# Allegro board 2440+TFT57-V1A11.brd
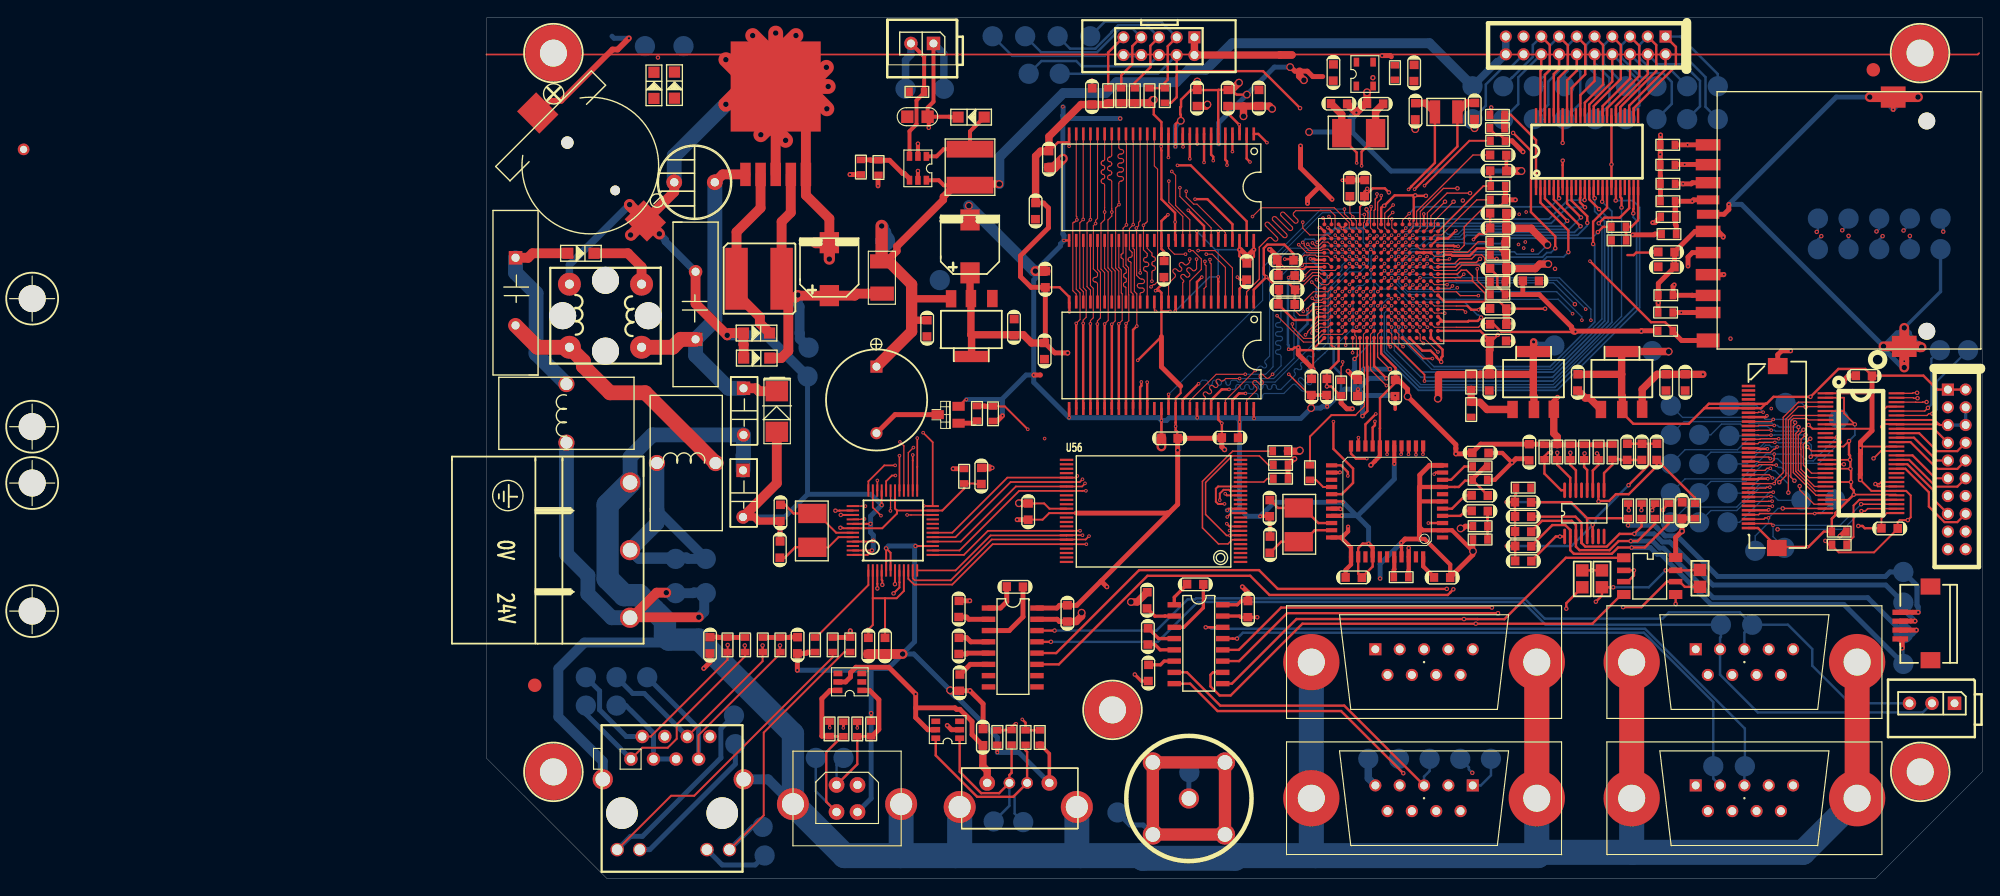
[diagram p0: board, top side]
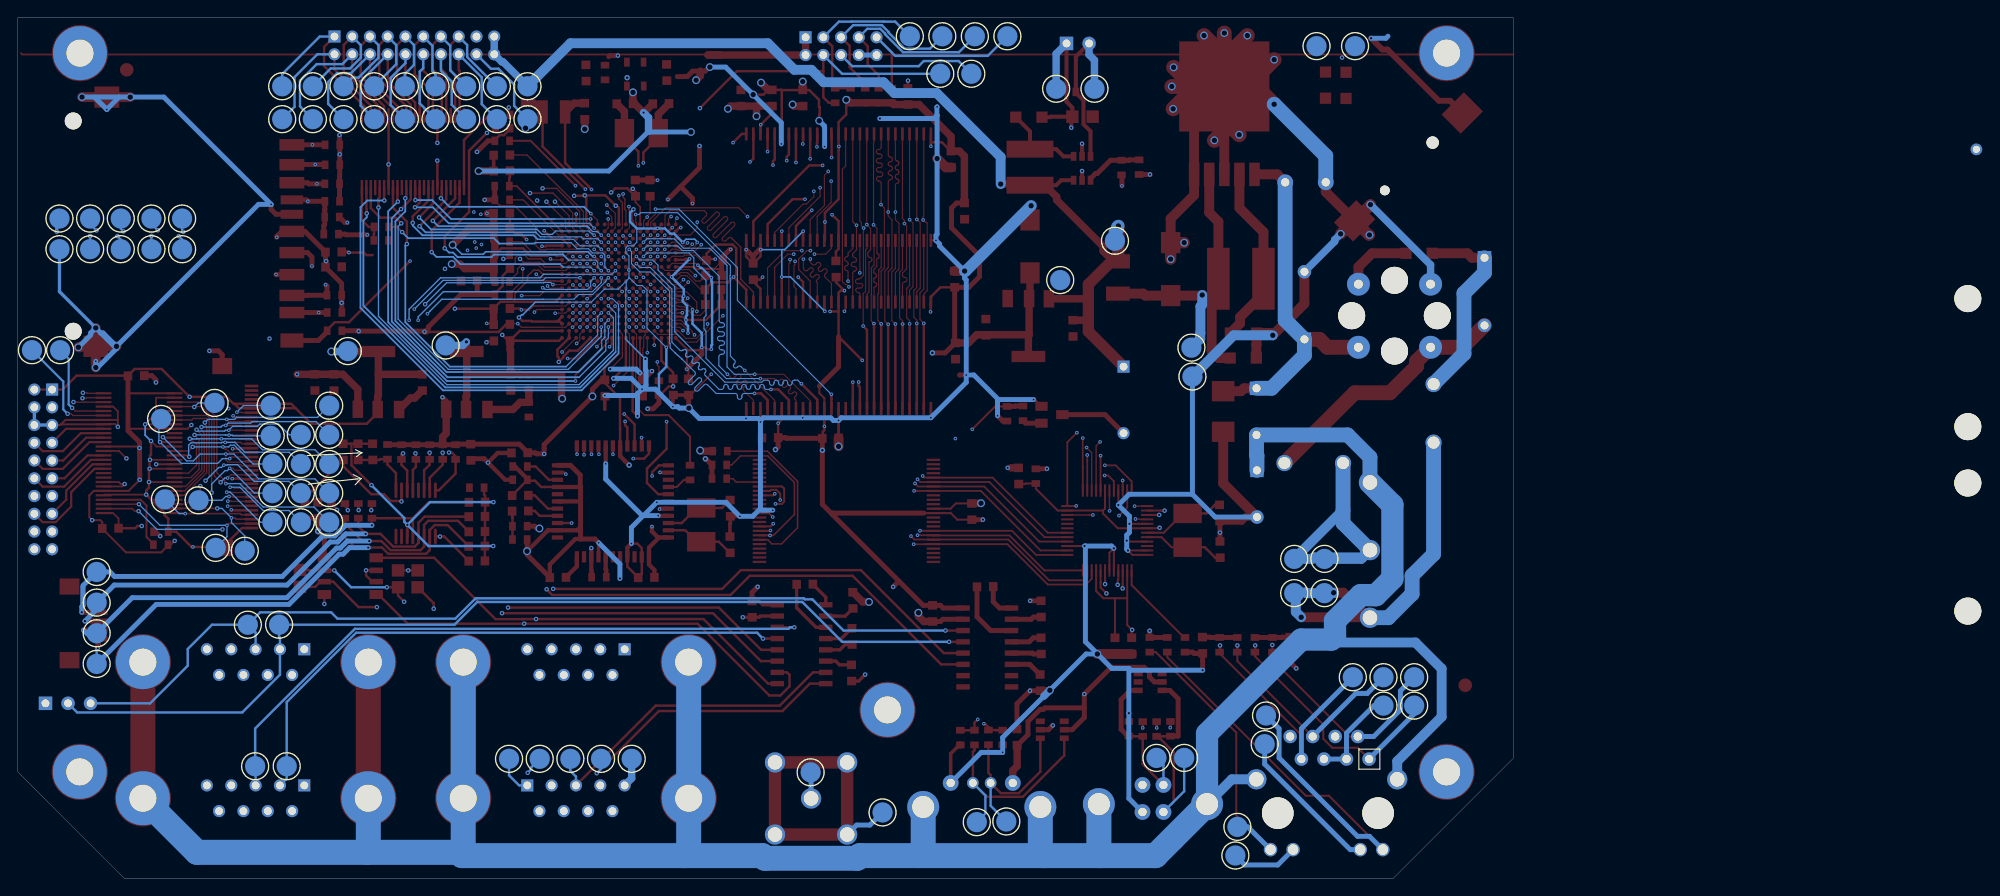
[diagram p1: board, bottom side, seen from below]

Outline 168.5 x 96.98 mm; copper layers: TOP, GND, SIG3, SIG4, VCC, BOTTOM. Coordinates in mm from the lower left corner of the outline.
Outline path: 0,96.98 0,13.51 13.51,0 156.51,0 168.5,11.99 168.5,96.98 0,96.98

## Placement (name value [footprint] x y rotation side)
BT1  BAT/3V/DIP  [BATTCR1220]  11.61 80.39 225 top
BUZZER  -  [BUZZER]  43.92 57.66 270 top
C1  0.1uF  [C0603]  25.15 26.23 270 top
C2  10uf/1206/16V  [C0603]  61.82 75.16 270 top
C3  0.1uF  [C0603]  98.93 77.8 90 top
C4  10uf/1206/16V  [C0603]  117.45 47.98 270 top
C5  10uf/1206/16V  [C0603]  112.95 55.85 270 top
C6  0.047uF  [DIO300C]  3.25 66.12 180 top
C7  0.1uF  [C0603]  114 79.71 0 top
C8  0.047uF  [DIO200C]  28.94 55.22 180 top
C9  0.1uF  [C0603]  35.01 26.23 270 top
C10  100uF  [CAPAE660X570L]  38.61 66.42 90 top
C11  0.1uF  [C0603]  55.93 15.93 90 top
C12  0.1uF  [C0603]  135.03 55.85 270 top
C13  220uf/ECAP-8/35V  [ECAP-8]  23.42 78.44 0 top
C14  1000pf  [C0603]  114 74.93 0 top
C15  10U  [C0603]  42.98 26.16 270 top
C16  100uF  [CAPAE660X570L]  54.46 68.99 90 top
C17  330pf  [C0603]  114 73.25 0 top
C18  680pf  [C0603]  114 81.48 0 top
C19  0.1uF  [C0603]  102.34 55.22 270 top
C20  10uF  [C0603]  62.84 59.39 270 top
C21  0.1uF  [C0603]  134.7 41.48 90 top
C22  10uF  [C0603]  132.89 68.91 180 top
C23  0.1uF  [C0603]  61.04 41.35 90 top
C24  0.1uF  [C0603]  59.44 62.13 90 top
C25  0.1UF  [C0603]  114 64.19 0 top
C26  0.1UF  [C0603]  92.91 55.35 270 top
C27  0.1UF  [C0603]  113.97 60.55 0 top
C28  0.1UF  [C0603]  98.12 55.22 270 top
C29  0.1UF  [C0603]  90.09 67.94 180 top
C30  0.1UF  [C0603]  97.28 77.8 90 top
C31  0.1UF  [C0603]  85.65 68.4 90 top
C32  0.1UF  [C0603]  83.77 49.63 0 top
C33  0.1UF  [C0603]  94.64 55.35 270 top
C34  0.1UF  [C0603]  63.32 81 270 top
C35  0.1UF  [C0603]  80.06 87.96 90 top
C36  0.1UF  [C0603]  114 62.41 0 top
C37  0.1UF  [C0603]  114 68.71 0 top
C38  0.1UF  [C0603]  90.14 66.34 180 top
C39  0.1UF  [C0603]  83.52 87.96 90 top
C40  0.1UF  [C0603]  95.38 90.78 270 top
C41  0.1UF  [C0603]  90.09 64.69 180 top
C42  0.1UF  [C0603]  76.91 49.61 180 top
C43  0.1UF  [C0603]  76.33 68.68 90 top
C44  0.1UF  [C0603]  62.97 67.54 90 top
C45  0.1UF  [C0603]  104.47 90.73 270 top
C46  22PF  [C0603]  96.06 87.27 0 top
C47  22PF  [C0603]  100.08 87.3 180 top
C49  0.1uF  [C0603]  85.75 30.3 270 top
C50  0.1uF  [C0603]  132.89 70.59 180 top
C51  22PF  [C0603]  111.3 86.44 270 top
C52  22PF  [C0603]  104.62 86.41 270 top
C54  0.1uF  [C0603]  97.71 33.88 0 top
C58  0.1uF  [C0603]  89.97 69.67 180 top
C60  0.1uF  [C0603]  68.22 88.14 90 top
C61  0.1uF  [C0603]  65.41 29.82 270 top
C62  0.047uF  [DIO200C]  28.89 45.97 180 top
C63  0.047uF  [DIO300C]  23.54 64.54 0 top
C64  0.1uF  [C0603]  131.85 48.08 90 top
C65  10uf/0603/16V  [C0603]  116.76 35.76 180 top
C66  10uf  [C0603]  128.52 48.08 90 top
C67  0.1uF  [C0603]  130.18 48.08 90 top
C68  1000p  [C0603]  116.76 37.44 180 top
C69  1000p  [C0603]  116.75 39.08 180 top
C70  1000p  [C0603]  116.75 40.78 180 top
C71  1000p  [C0603]  116.74 42.39 180 top
C72  47nF  [C0603]  111.86 41.4 180 top
C73  20P  [C0603]  88.24 41.73 90 top
C74  20P  [C0603]  88.24 37.57 270 top
C75  47nF  [C0603]  111.86 43.15 180 top
C76  47nF  [C0603]  107.62 33.91 180 top
C77  1uf/25V  [C0805]  48.54 85.83 90 top
C78  0.1uF  [C0603]  44.86 26.16 270 top
C79  10PF  [C0603]  33.06 37.07 90 top
C80  10PF  [C0603]  33.08 41.15 270 top
C81  0.1uF  [RC0603]  55.75 45.36 90 top
C82  10uf/1206/16V  [C0603]  87.02 87.96 90 top
C83  100uF/CAP-D  [C0603]  117.68 67.31 0 top
C84  0.1uF  [C0603]  132.87 55.85 270 top
C85  0.1uF  [C0603]  111.99 47.93 0 top
C86  0.1uF  [C0603]  59.49 32.87 180 top
C87  0.1uF  [C0603]  53.21 30.38 90 top
C88  0.1uF  [C0603]  53.31 22.07 90 top
C89  0.1uF  [C0603]  53.21 26.21 90 top
C90  0.1uF  [C0603]  74.4 31.29 270 top
C91  0.1uF  [C0603]  74.57 23.16 90 top
C92  0.1uF  [C0603]  79.81 33.15 180 top
C93  0.1uF  [C0603]  74.52 27.28 90 top
C94  0.1uF  [C0603]  155.14 56.64 180 top
C95  0.1uF  [C0603]  158.04 39.45 180 top
CB1  0.1uF  [C0603]  49.61 61.95 270 top
CB2  10uf  [C0603]  122.91 55.85 270 top
CON1  JTAG  [HEADER5X2_2MM]  75.74 93.78 270 top
D3  sod123  [SOD123]  30.4 61.44 180 top
D4  sod123  [SOD123]  10.62 70.43 180 top
D9  SS14  [SOD123]  54.58 85.78 0 top
D10  1N5819  [B130L]  32.69 52.6 270 top
D11  sod123  [SOD123]  30.43 58.62 180 top
DB1  sod123  [SOD123]  18.85 89.36 270 top
DB2  sod123  [SOD123]  21.16 89.38 270 top
F1  FUSE  [R1210]  44.53 67.74 180 top
H1  -  [HEADER2]  50.34 94.08 180 top
HOSTA  USB-A  [USBAH]  59.89 10.74 270 top
I/OPROT1  FPC_18p_DOWN  [HEADER10X2_2MM]  123.82 93.86 270 top
J2  HEADER 1  [MH250C120D]  7.52 92.99 0 top
J3  HEADER 1  [MH250C120D]  7.52 11.99 0 top
J4  HEADER 1  [MH250C120D]  70.51 18.97 0 top
J5  HEADER 1  [MH250C120D]  161.52 11.99 0 top
J8  HEADER 1  [MH250C120D]  161.49 92.99 0 top
J19  HEADER 1  [MH150]  -51.21 65.32 0 top
J21  HEADER 1  [MH150]  -51.21 50.89 0 top
J22  HEADER 1  [MH150]  -51.21 30.11 0 top
J23  HEADER 1  [MH150]  -51.21 44.54 0 top
J24  SD  [SD-PROA]  159.72 59.94 90 top
L6  100UH  [CD75]  30.69 67.56 270 top
L7  22UH  [CDRH4D18]  54.46 80.14 0 top
L8  F.B/120  [R0603]  53.8 45.31 270 top
L10  F.B/120  [R0603]  111.91 44.91 0 top
L12  F.B/120  [R0603]  116.79 44.02 180 top
L13  F.B/120  [L-260X600]  8.99 52.4 90 top
L14  choke  [CHOKE_UU_11X12]  13.39 63.4 0 top
L15  F.B/120  [L-260X600]  22.49 46.79 0 top
LAN1  HY951180A  [RJ45_HY]  16.26 13.44 270 top
LVDS1  HEADER10x2_2mm  [HEADER10X2_2MM]  165.63 46.08 0 top
NOREF  -  [unnamed]  156.23 91.11 0 top
NOREF#2  -  [unnamed]  5.42 21.75 0 top
Q2  3904  [SOT23]  51.99 52.25 270 top
R1  NC  [R0603]  113.87 84.53 0 top
R2  NC  [R0603]  127.56 71.88 0 top
R3  10k  [R0603]  57.05 52.35 270 top
R4  33R  [R0603]  29.12 26.31 270 top
R5  10k  [R0603]  44.15 80.09 90 top
R6  10k  [R0603]  110.92 55.93 270 top
R7  10k  [R0603]  110.92 52.81 90 top
R8  510  [R0603]  38.98 26.31 270 top
R9  510  [R0603]  40.97 26.31 270 top
R10  NC  [R0603]  113.87 86.03 0 top
R11  NC  [R0603]  127.53 73.41 0 top
R12  100  [R0603]  133.17 41.4 90 top
R13  100  [R0603]  131.65 41.4 90 top
R14  100  [R0603]  130.12 41.4 90 top
R15  100  [R0603]  128.6 41.4 90 top
R16  100R  [R0603]  113.94 78 180 top
R17  100R  [R0603]  102.34 90.8 270 top
R18  10K  [R0603]  113.92 83.11 180 top
R19  10K  [R0603]  89.46 46.58 180 top
R20  10K  [R0603]  89.46 45.03 180 top
R21  10k  [R0603]  42.16 80.14 90 top
R22  10K  [R0603]  113.92 71.73 0 top
R23  10K  [R0603]  113.92 65.79 0 top
R24  10K  [R0603]  113.92 67.23 0 top
R25  1.5K  [R0603]  38.63 16.84 270 top
R26  510K  [R0603]  43.32 16.84 270 top
R27  33R  [R0603]  27.13 26.31 270 top
R28  33R  [R0603]  33.1 26.31 270 top
R29  10K  [R0603]  113.92 70.26 0 top
R30  0  [R0603]  89.38 48.13 180 top
R31  10K  [R0603]  133.08 76.3 0 top
R32  10K  [R0603]  132.81 61.7 0 top
R33  10K  [R0603]  133.06 80.41 0 top
R34  10K  [R0603]  132.81 63.76 0 top
R35  10K  [R0603]  132.84 65.7 0 top
R36  10K  [R0603]  133.08 78.27 0 top
R37  33R  [R0603]  31.11 26.31 270 top
R38  10K  [R0603]  133.06 82.66 0 top
R39  10K  [R0603]  133.1 74.52 0 top
R40  10K  [R0603]  133.2 72.59 0 top
R41  10K  [R0603]  70.03 88.21 270 top
R42  10K  [R0603]  71.5 88.21 270 top
R43  10K  [R0603]  73.02 88.21 270 top
R44  10K  [R0603]  74.68 88.21 270 top
R45  1K  [R0603]  76.4 88.21 270 top
R46  0  [R0603]  113.92 76.45 0 top
R47  4.7K  [R0603]  96.27 55.25 90 top
R48  10k  [R0603]  55.25 52.4 270 top
R49  F.B/120  [R0603]  136.14 41.4 90 top
R50  10K  [R0603]  120.62 48.03 90 top
R51  10K  [R0603]  119.18 48.03 90 top
R52  10K  [R0603]  122.1 48.03 90 top
R53  10K  [R0603]  123.65 48.03 90 top
R54  10K  [R0603]  125.27 48.03 90 top
R55  F.B/120  [R0603]  126.85 48.06 270 top
R56  5R1  [R0603]  48.46 88.62 0 top
R57  18  [R0603]  111.94 39.67 180 top
R58  56  [R0603]  111.94 38.18 180 top
R59  1.5K  [R0603]  103.02 33.93 0 top
R60  10  [R0603]  92.76 45.72 270 top
R61  5.1K  [R0603]  111.91 46.41 0 top
R62  6.8K,1%  [R0603]  36.99 26.31 270 top
R63  10k  [R0603]  152.37 39.07 0 top
R64  10k  [R0603]  152.4 37.59 180 top
R65  120R  [R0805]  136.7 34.75 0 top
R66  0R  [R0805]  125.65 32.79 180 top
R67  0R  [R0805]  123.44 32.79 180 top
RDM  22R  [R0603]  41.76 16.81 90 top
RDP  22R  [R0603]  40.2 16.81 90 top
RS485  DB9  [DB9-DIP]  105.61 9.02 0 top
RU1  15K  [R0603]  62.31 15.85 90 top
RU2  15K  [R0603]  57.54 15.85 90 top
RUN  22R  [R0603]  59.14 15.88 90 top
RUP  22R  [R0603]  60.71 15.85 90 top
SLAVE  USB-B  [USB_B_VERTICAL]  39.42 7.47 0 top
SN75LVDS83B1  SN75LVDS83B  [TSSOP56]  154.84 47.9 0 top
T1  TP  [TEST55]  51.05 67.41 180 bottom
T2  TP  [TEST55]  120.29 60.05 180 bottom
T3  TP  [TEST55]  22.17 93.78 180 bottom
T4  TP  [TEST55]  24.69 32.13 180 bottom
T5  TP  [TEST55]  21.29 32.13 180 bottom
T6  TP  [TEST55]  21.29 35.99 180 bottom
T7  TP  [TEST55]  24.69 35.99 180 bottom
T8  TP  [TEST55]  36.27 59.8 180 bottom
T9  TP  [TEST55]  36.15 56.54 180 bottom
T10  TP  [TEST55]  11.18 19.46 180 bottom
T11  TP  [TEST55]  11.18 22.66 180 bottom
T12  TP  [TEST55]  14.63 19.46 180 bottom
T13  TP  [TEST55]  14.63 22.66 180 bottom
T14  TP  [TEST55]  18.08 22.66 180 bottom
T15  TP  [TEST55]  27.86 18.34 180 bottom
T16  TP  [TEST55]  28.02 15.11 180 bottom
T17  TP  [TEST55]  31.32 2.57 180 bottom
T18  TP  [TEST55]  31.09 5.79 180 bottom
T19  TP  [TEST55]  79.17 11.94 180 bottom
T20  TP  [TEST55]  71.07 7.42 180 bottom
T21  TP  [TEST55]  146.2 37.24 180 bottom
T22  TP  [TEST55]  142.93 36.91 180 bottom
T23  TP  [TEST55]  151.92 42.7 180 bottom
T24  TP  [TEST55]  166.9 59.51 180 bottom
T25  TP  [TEST55]  163.73 59.51 180 bottom
T26  TP  [TEST55]  148.13 42.6 180 bottom
T27  TP  [TEST55]  139.81 40.12 180 bottom
T28  TP  [TEST55]  136.61 40.12 180 bottom
T29  TP  [TEST55]  133.41 40.12 180 bottom
T30  TP  [TEST55]  146.33 53.57 180 bottom
T31  TP  [TEST55]  139.81 43.4 180 bottom
T32  TP  [TEST55]  136.61 43.4 180 bottom
T33  TP  [TEST55]  133.41 43.4 180 bottom
T34  TP  [TEST55]  152.35 51.77 180 bottom
T35  TP  [TEST55]  139.81 46.69 180 bottom
T36  TP  [TEST55]  136.61 46.69 180 bottom
T37  TP  [TEST55]  133.41 46.69 180 bottom
T38  TP  [TEST55]  140 49.86 180 bottom
T39  TP  [TEST55]  136.61 49.98 180 bottom
T40  TP  [TEST55]  133.41 49.98 180 bottom
T41  TP  [TEST55]  133.41 53.26 180 bottom
T42  TP  [TEST55]  140 53.26 180 bottom
T44  TP  [TEST55]  51.51 88.98 180 bottom
T45  TP  [TEST55]  47.19 88.98 180 bottom
T46  TP  [TEST55]  159.61 24.16 180 bottom
T47  TP  [TEST55]  159.61 27.61 180 bottom
T48  TP  [TEST55]  159.61 31.06 180 bottom
T49  TP  [TEST55]  159.61 34.52 180 bottom
T50  TP  [TEST55]  139.06 28.57 180 bottom
T51  TP  [TEST55]  142.58 28.57 180 bottom
T52  TP  [TEST55]  138.2 12.62 180 bottom
T53  TP  [TEST55]  141.76 12.62 180 bottom
T54  TP  [TEST55]  102.79 13.46 180 bottom
T55  TP  [TEST55]  106.24 13.46 180 bottom
T56  TP  [TEST55]  99.33 13.46 180 bottom
T57  TP  [TEST55]  44.88 71.84 180 bottom
T58  TP  [TEST55]  114.53 85.55 180 bottom
T59  TP  [TEST55]  111.07 85.55 180 bottom
T60  TP  [TEST55]  114.53 89.26 180 bottom
T61  TP  [TEST55]  117.98 89.26 180 bottom
T62  TP  [TEST55]  117.98 85.55 180 bottom
T63  TP  [TEST55]  121.44 85.55 180 bottom
T64  TP  [TEST55]  121.44 89.26 180 bottom
T65  TP  [TEST55]  124.89 89.26 180 bottom
T66  TP  [TEST55]  124.89 85.55 180 bottom
T67  TP  [TEST55]  128.35 85.55 180 bottom
T68  TP  [TEST55]  131.8 85.55 180 bottom
T69  TP  [TEST55]  128.35 89.26 180 bottom
T70  TP  [TEST55]  131.8 89.26 180 bottom
T71  TP  [TEST55]  135.26 85.55 180 bottom
T72  TP  [TEST55]  138.71 85.55 180 bottom
T73  TP  [TEST55]  135.26 89.26 180 bottom
T74  TP  [TEST55]  138.71 89.26 180 bottom
T75  TP  [TEST55]  40.21 13.56 180 bottom
T76  TP  [TEST55]  111.07 89.26 180 bottom
T77  TP  [TEST55]  37.08 13.56 180 bottom
T78  TP  [TEST55]  57.12 6.4 180 bottom
T80  TP  [TEST55]  60.45 6.32 180 bottom
T81  TP  [TEST55]  131.32 59.41 180 bottom
T82  TP  [TEST55]  17.83 93.78 180 bottom
T83  TP  [TEST55]  68 94.89 180 bottom
T84  TP  [TEST55]  64.33 94.89 180 bottom
T85  TP  [TEST55]  60.67 94.89 180 bottom
T86  TP  [TEST55]  57.01 94.89 180 bottom
T87  TP  [TEST55]  64.56 90.67 180 bottom
T88  TP  [TEST55]  61.07 90.67 180 bottom
T89  TP  [TEST55]  163.8 74.35 180 bottom
T90  TP  [TEST55]  163.8 70.89 180 bottom
T91  TP  [TEST55]  160.35 74.35 180 bottom
T92  TP  [TEST55]  160.35 70.89 180 bottom
T93  TP  [TEST55]  156.9 74.35 180 bottom
T94  TP  [TEST55]  156.9 70.89 180 bottom
T95  TP  [TEST55]  153.44 74.35 180 bottom
T96  TP  [TEST55]  153.44 70.89 180 bottom
T97  TP  [TEST55]  149.99 74.35 180 bottom
T98  TP  [TEST55]  149.99 70.89 180 bottom
T99  TP  [TEST55]  109.69 13.46 180 bottom
T100  TP  [TEST55]  113.15 13.46 180 bottom
T*  -  [unnamed#2]  -52.17 82.14 0 top
TP2  HEADCONN_5P  [FH12-4-1SH]  160.07 28.47 270 top
TV_IN1  TV_IN  [BNC_L]  79.12 8.99 0 top
U1  74LCX16245/SSOP48-S  [TSSOP48]  123.98 81.89 90 top
U8  LM2576-5v/TO252  [TO263]  29.16 79.32 0 top
U18  DM9000AE  [LQPFP48]  45.76 39.19 0 top
U19  MAX3232C/SOP16  [SOP16]  56.54 30.45 270 top
U36  MAX485/SOP8  [SOP8]  128.37 35.97 270 top
U37  MAX3232C/SOP16  [SOP16]  77.47 30.82 270 top
U38  LM1117-33/SOT-223  [SOT-223]  54.64 65.28 180 top
U39  LM1117-33/SOT-223  [SOT-223]  127.88 52.88 0 top
U42  TCS5180/SOT23-6  [SOT23-6]  48.59 80.01 180 top
U45  SAA7113H/PQFP44  [PQFP44]  101.45 42.47 180 top
U49  ADS7843/TSSOP16  [SSOP16]  123.67 41.12 90 top
U51  S3C2410X_45  [FBGA289]  100.78 67.29 90 top
U52  MAX811  [SOT23-4]  98.93 90.63 0 top
U53  LM1117-33/SOT-223  [SOT-223]  117.92 52.88 0 top
U54  K4S561632C-TC75 (32MB)  [TSOP54-II]  76.02 77.88 180 top
U55  K4S561632C-TC75 (32MB)  [TSOP54-II]  76.02 58.94 180 top
U56  K9GAG08U0M/TSOP48  [TSOP48]  75.13 41.4 90 top
UART0  -  [HEADER3]  161.57 19.72 180 top
UART1  DB9  [DB9-DIP-1]  141.71 9.02 0 top
UART2  DB9  [DB9-DIP-1]  105.61 24.36 0 top
UART3  DB9  [DB9-DIP-1]  141.71 24.36 0 top
UNK12V  HEADER 1  [HEADER300-3]  16.15 36.98 270 top
UNK57TFT  K4S561632C-TC75 (32MB)  [FH12-33S-05SF01]  142.16 45.72 270 top
UU1  NUP2201MR6/SOT23-6  [SOT23-6]  40.92 22.12 90 top
UU2  NUP2201MR6/SOT23-6  [SOT23-6]  51.94 16.74 90 top
Y4  32.768KHz  [32768-2PINSMD]  106.83 86.36 180 top
Y6  25MHz  [CRYSTAL5X3]  36.7 37.3 90 top
Y11  24.576MHz  [CRYSTAL5X3]  91.49 41.73 270 top
Y12  12MHz  [CRYSTAL5X3]  96.34 83.97 0 top

## Library data of the parts
BT1 = BATTERY_3
BUZZER = MICROPHONE
C1 C9 C78 = CAP NP
C2 C4 C5 C15 = 03CAP+_0
C3 C11 C12 C49 C50 C54 C58 C60 C61 C84 CB1 CB2 = CAP_0.1uF_0603
C6 C8 C25-C47 C51 C52 C62 C63 C81-C83 = CAP NP_1
C7 C14 C17-C24 C72-C76 = CAP NP_4
C10 C13 C16 C66 = CAPACITOR POL_0
C64 C67-C71 C79 C80 = CAPACITOR NON-POL_0
C65 = CAPACITOR POL_1
C77 C85-C93 = C_0
C94 C95 = CAP_4.1uF_0603
CON1 = CY7C68013A-100_11
D3 D9 = DIODE
D4 D10 D11 DB1 DB2 = DIODE SCHOTTKY_1
F1 = FUSE_0
H1 = CON2_1
HOSTA SLAVE = CON2_3
I/OPROT1 = SH_TFT_0
J2-J5 J8 J19 J21-J23 = HEADER 1
J24 = SD_7
L6 L7 L10 = INDUCTOR_0
L8 L12 = INDUCTOR_2
L13 L15 = INDUCTOR_1
L14 = INDUCTOR_3
LAN1 = CON12_6
LVDS1 = 20Pin_0
Q2 = NPN_0
R1-R3 R5-R7 R10 R11 R21 R48 = R_0
R4 R18 R25-R28 R37 R56-R61 = RESISTOR_2
R8 R9 R16 R17 R31-R36 R38-R40 R62 = R
R12-R15 R63 R64 = RESISTOR_0
R19 R20 R22-R24 R29 R30 R41-R47 R65-R67 RDM RDP RU1 RU2 RUN RUP = R_1
R49-R55 = R_2
RS485 = CONNECTOR DB9_3
SN75LVDS83B1 = K4S561632C_0
T1-T42 T44-T78 T80-T100 = TEST_9
TP2 = HEADER 5_2
TV_IN1 = CY7C68013A-100_13
U1 = 74ALVC164245_0
U8 = CY7C68013A-100_5
U18 = DM9000AE_1
U19 = max232_0
U36 = MNE20-5G5P10_1
U37 U52 = max232_2
U38 U39 U53 = CY7C68013A-100_1
U42 = HEADER 5_1
U45 = GL811USB _1: Tolerance: ***; User Part Number: ***
U49 = ADS7843_3
U51 = S3C2410X_45
U54 U55 = K4S561632C_1
U56 = K9WAG08_0
UART0 = HEADER 11_3
UART1-UART3 = CONNECTOR DB9_2
UNK12V = HEADER 1_2
UNK57TFT = K4S561632C_3
UU1 UU2 = XC9216_3
Y4 = CRYSTAL_4
Y6 = HC-49_0
Y11 Y12 = CRYSTAL_3

## Footprints (pads in the part's own frame, mm; a bottom-side part is the same pattern mirrored in y, then rotated)
32768-2PINSMD
  rect 1.194x2.642 smd: 1(-2.54,0) 2(0,0)
B130L
  rect 2.286x2.54 smd: 1(2.286,0) 2(-2.286,0)
BATTCR1220
  round 1.397 hole 1.397 unplated: (0,-3.556)
  rect 3.048x3.556 smd: 1(0,-8.28) 2(0.025,8.89)
  round 1.092 hole 1.092: 3(0,4.064)
BNC_L
  round 2.286 hole 1.651: 1(0,0) 2(4.064,4.064) 3(4.064,-4.064) 4(-4.064,4.064) 5(-4.064,-4.064)
BUZZER
  rect 1.372x1.372 hole 0.889: 1(0,0)
  round 1.372 hole 0.889: 2(7.5,0)
C0603
  rect 0.965x1.016 smd: 1(-0.94,0.025) 2(0.889,0)
C0805
  rect 1.422x1.397 smd: 1(0,1.143) 2(0,-1.143)
CAPAE660X570L
  rect 2.388x2.184 smd: 1(-0.762,0) 2(5.207,0)
CD75
  rect 6.985x2.54 smd: 1(0,2.54) 2(0,-2.54)
CDRH4D18
  rect 5.283x1.905 smd: 1(0,2.032) 2(0,-2.032)
CHOKE_UU_11X12
  round 3.048 hole 3.048 unplated: (-4.826,0) (0,3.988) (0,-3.988) (4.826,0)
  round 2.591 hole 1.016: 1(-4.064,-3.556) 2(4.064,-3.556) 3(4.064,3.556) 4(-4.064,3.556)
CRYSTAL5X3
  rect 2.184x3.2 smd: 1(0,0) 2(3.81,0)
DB9-DIP
  rect 1.372x1.372 hole 0.889: 1(5.486,1.448)
  round 1.372 hole 0.889: 2(2.743,1.448) 3(0,1.448) 4(-2.743,1.448) 5(-5.486,1.448) 6(4.115,-1.448) 7(1.372,-1.448) 8(-1.372,-1.448) 9(-4.115,-1.448)
  round 6.35 hole 3.048: 10(-12.7,0) 11(12.7,0)
DB9-DIP-1
  rect 1.372x1.372 hole 0.889: 1(-5.486,1.448)
  round 1.372 hole 0.889: 2(-2.743,1.448) 3(0,1.448) 4(2.743,1.448) 5(5.486,1.448) 6(-4.115,-1.448) 7(-1.372,-1.448) 8(1.372,-1.448) 9(4.115,-1.448)
  round 6.35 hole 3.048: 10(-12.7,0) 11(12.7,0)
DIO200C
  rect 1.524x1.524 hole 0.914: 1(0,0)
  round 1.524 hole 0.914: 2(0,5.258)
DIO300C
  rect 1.524x1.524 hole 0.914: 1(0,-3.81)
  round 1.524 hole 0.914: 2(0,3.81)
ECAP-8
  round 1.778 hole 0.94: 1(2.286,0) 2(-2.286,0)
FBGA289
  round 0.457 smd: A1(-6.4,6.4) A2(-5.6,6.4) A3(-4.8,6.4) A4(-4,6.4) A5(-3.2,6.4) A6(-2.4,6.4) A7(-1.6,6.4) A8(-0.8,6.4) A9(0,6.4) A10(0.8,6.4) A11(1.6,6.4) A12(2.4,6.4) A13(3.2,6.4) A14(4,6.4) A15(4.8,6.4) A16(5.6,6.4) A17(6.4,6.4) B1(-6.4,5.6) B2(-5.6,5.6) B3(-4.8,5.6) B4(-4,5.6) B5(-3.2,5.6) B6(-2.4,5.6) B7(-1.6,5.6) B8(-0.8,5.6) B9(0,5.6) B10(0.8,5.6) B11(1.6,5.6) B12(2.4,5.6) B13(3.2,5.6) B14(4,5.6) B15(4.8,5.6) B16(5.6,5.6) B17(6.4,5.6) C1(-6.4,4.8) C2(-5.6,4.8) C3(-4.8,4.8) C4(-4,4.8) C5(-3.2,4.8) C6(-2.4,4.8) C7(-1.6,4.8) C8(-0.8,4.8) C9(0,4.8) C10(0.8,4.8) C11(1.6,4.8) C12(2.4,4.8) C13(3.2,4.8) C14(4,4.8) C15(4.8,4.8) C16(5.6,4.8) C17(6.4,4.8) D1(-6.4,4) D2(-5.6,4) D3(-4.8,4) D4(-4,4) D5(-3.2,4) D6(-2.4,4) D7(-1.6,4) D8(-0.8,4) D9(0,4) D10(0.8,4) D11(1.6,4) D12(2.4,4) D13(3.2,4) D14(4,4) D15(4.8,4) D16(5.6,4) D17(6.4,4) E1(-6.4,3.2) E2(-5.6,3.2) E3(-4.8,3.2) E4(-4,3.2) E5(-3.2,3.2) E6(-2.4,3.2) E7(-1.6,3.2) E8(-0.8,3.2) E9(0,3.2) E10(0.8,3.2) E11(1.6,3.2) E12(2.4,3.2) E13(3.2,3.2) E14(4,3.2) E15(4.8,3.2) E16(5.6,3.2) E17(6.4,3.2) F1(-6.4,2.4) F2(-5.6,2.4) F3(-4.8,2.4) F4(-4,2.4) F5(-3.2,2.4) F6(-2.4,2.4) F7(-1.6,2.4) F8(-0.8,2.4) F9(0,2.4) F10(0.8,2.4) F11(1.6,2.4) F12(2.4,2.4) F13(3.2,2.4) F14(4,2.4) F15(4.8,2.4) F16(5.6,2.4) F17(6.4,2.4) G1(-6.4,1.6) G2(-5.6,1.6) G3(-4.8,1.6) G4(-4,1.6) G5(-3.2,1.6) G6(-2.4,1.6) G7(-1.6,1.6) G8(-0.8,1.6) G9(0,1.6) G10(0.8,1.6) G11(1.6,1.6) G12(2.4,1.6) G13(3.2,1.6) G14(4,1.6) G15(4.8,1.6) G16(5.6,1.6) G17(6.4,1.6) H1(-6.4,0.8) H2(-5.6,0.8) H3(-4.8,0.8) H4(-4,0.8) H5(-3.2,0.8) H6(-2.4,0.8) H7(-1.6,0.8) H8(-0.8,0.8) H9(0,0.8) H10(0.8,0.8) H11(1.6,0.8) H12(2.4,0.8) H13(3.2,0.8) H14(4,0.8) H15(4.8,0.8) H16(5.6,0.8) H17(6.4,0.8) J1(-6.4,0) J2(-5.6,0) J3(-4.8,0) J4(-4,0) J5(-3.2,0) J6(-2.4,0) J7(-1.6,0) J8(-0.8,0) J9(0,0) J10(0.8,0) J11(1.6,0) J12(2.4,0) J13(3.2,0) J14(4,0) J15(4.8,0) J16(5.6,0) J17(6.4,0) K1(-6.4,-0.8) K2(-5.6,-0.8) K3(-4.8,-0.8) K4(-4,-0.8) K5(-3.2,-0.8) K6(-2.4,-0.8) K7(-1.6,-0.8) K8(-0.8,-0.8) K9(0,-0.8) K10(0.8,-0.8) K11(1.6,-0.8) K12(2.4,-0.8) K13(3.2,-0.8) K14(4,-0.8) K15(4.8,-0.8) K16(5.6,-0.8) K17(6.4,-0.8) L1(-6.4,-1.6) L2(-5.6,-1.6) L3(-4.8,-1.6) L4(-4,-1.6) L5(-3.2,-1.6) L6(-2.4,-1.6) L7(-1.6,-1.6) L8(-0.8,-1.6) L9(0,-1.6) L10(0.8,-1.6) L11(1.6,-1.6) L12(2.4,-1.6) L13(3.2,-1.6) L14(4,-1.6) L15(4.8,-1.6) L16(5.6,-1.6) L17(6.4,-1.6) M1(-6.4,-2.4) M2(-5.6,-2.4) M3(-4.8,-2.4) M4(-4,-2.4) M5(-3.2,-2.4) M6(-2.4,-2.4) M7(-1.6,-2.4) M8(-0.8,-2.4) M9(0,-2.4) M10(0.8,-2.4) M11(1.6,-2.4) M12(2.4,-2.4) M13(3.2,-2.4) M14(4,-2.4) M15(4.8,-2.4) M16(5.6,-2.4) M17(6.4,-2.4) N1(-6.4,-3.2) N2(-5.6,-3.2) N3(-4.8,-3.2) N4(-4,-3.2) N5(-3.2,-3.2) N6(-2.4,-3.2) N7(-1.6,-3.2) N8(-0.8,-3.2) N9(0,-3.2) N10(0.8,-3.2) N11(1.6,-3.2) N12(2.4,-3.2) N13(3.2,-3.2) N14(4,-3.2) N15(4.8,-3.2) N16(5.6,-3.2) N17(6.4,-3.2) P1(-6.4,-4) P2(-5.6,-4) P3(-4.8,-4) P4(-4,-4) P5(-3.2,-4) P6(-2.4,-4) P7(-1.6,-4) P8(-0.8,-4) P9(0,-4) P10(0.8,-4) P11(1.6,-4) P12(2.4,-4) P13(3.2,-4) P14(4,-4) P15(4.8,-4) P16(5.6,-4) P17(6.4,-4) R1(-6.4,-4.8) R2(-5.6,-4.8) R3(-4.8,-4.8) R4(-4,-4.8) R5(-3.2,-4.8) R6(-2.4,-4.8) R7(-1.6,-4.8) R8(-0.8,-4.8) R9(0,-4.8) R10(0.8,-4.8) R11(1.6,-4.8) R12(2.4,-4.8) R13(3.2,-4.8) R14(4,-4.8) R15(4.8,-4.8) R16(5.6,-4.8) R17(6.4,-4.8) T1(-6.4,-5.6) T2(-5.6,-5.6) T3(-4.8,-5.6) T4(-4,-5.6) T5(-3.2,-5.6) T6(-2.4,-5.6) T7(-1.6,-5.6) T8(-0.8,-5.6) T9(0,-5.6) T10(0.8,-5.6) T11(1.6,-5.6) T12(2.4,-5.6) T13(3.2,-5.6) T14(4,-5.6) T15(4.8,-5.6) T16(5.6,-5.6) T17(6.4,-5.6) U1(-6.4,-6.4) U2(-5.6,-6.4) U3(-4.8,-6.4) U4(-4,-6.4) U5(-3.2,-6.4) U6(-2.4,-6.4) U7(-1.6,-6.4) U8(-0.8,-6.4) U9(0,-6.4) U10(0.8,-6.4) U11(1.6,-6.4) U12(2.4,-6.4) U13(3.2,-6.4) U14(4,-6.4) U15(4.8,-6.4) U16(5.6,-6.4) U17(6.4,-6.4)
FH12-4-1SH
  rect 0.61x1.778 smd: 1(-1.5,-0.8) 2(-0.5,-0.8) 3(0.5,-0.8) 4(1.5,-0.8)
  rect 1.829x2.235 smd: 5(-4.4,2.6) 6(3.9,2.6)
FH12-33S-05SF01
  rect 0.305x1.524 smd: 1(-9.75,0) 2(-9.25,0) 3(-8.75,0) 4(-8.25,0) 5(-7.75,0) 6(-7.25,0) 7(-6.75,0) 8(-6.25,0) 9(-5.75,0) 10(-5.25,0) 11(-4.75,0) 12(-4.25,0) 13(-3.75,0) 14(-3.25,0) 15(-2.75,0) 16(-2.25,0) 17(-1.75,0) 18(-1.25,0) 19(-0.75,0) 20(-0.25,0) 21(0.25,0) 22(0.75,0) 23(1.25,0) 24(1.75,0) 25(2.25,0) 26(2.75,0) 27(3.25,0) 28(3.75,0) 29(4.25,0) 30(4.75,0) 31(5.25,0) 32(5.75,0) 33(6.25,0)
  rect 1.829x2.235 smd: 34(-12,3.3) 35(8.5,3.2)
HEADER2
  rect 1.524x1.524 hole 0.889: 1(0,0)
  round 1.524 hole 0.889: 2(2.54,0)
HEADER3
  rect 1.524x1.524 hole 0.889: 1(-3.81,0)
  round 1.524 hole 0.889: 2(-1.27,0) 3(1.27,0)
HEADER5X2_2MM
  rect 1.372x1.372 hole 0.889: 1(-1,4)
  round 1.372 hole 0.889: 2(1,4) 3(-1,2) 4(1,2) 5(-1,0) 6(1,0) 7(-1,-2) 8(1,-2) 9(-1,-4) 10(1,-4)
HEADER10X2_2MM
  rect 1.372x1.372 hole 0.889: 1(-1.001,8.999)
  round 1.372 hole 0.889: 2(1.001,8.999) 3(-1.001,7) 4(1.001,7) 5(-1.001,5.001) 6(1.001,5.001) 7(-1.001,3) 8(1.001,3) 9(-1.001,1.001) 10(1.001,1.001) 11(-1.001,-1.001) 12(1.001,-1.001) 13(-1.001,-3) 14(1.001,-3) 15(-1.001,-5.001) 16(1.001,-5.001) 17(-1.001,-7) 18(1.001,-7) 19(-1.001,-8.999) 20(1.001,-8.999)
HEADER300-3
  round 2.286 hole 1.651: 1(-7.62,0) 2(0,0) 3(7.62,0)
L-260X600
  round 1.829 hole 1.372: 1(-3.302,0) 2(3.302,0)
LQPFP48
  rect 0.229x1.397 smd: 1(-2.75,-4.5) 2(-2.25,-4.5) 3(-1.75,-4.5) 4(-1.25,-4.5) 5(-0.75,-4.5) 6(-0.25,-4.5) 7(0.25,-4.5) 8(0.75,-4.5) 9(1.25,-4.5) 10(1.75,-4.5) 11(2.25,-4.5) 12(2.75,-4.5) 25(2.75,4.5) 26(2.25,4.5) 27(1.75,4.5) 28(1.25,4.5) 29(0.75,4.5) 30(0.25,4.5) 31(-0.25,4.5) 32(-0.75,4.5) 33(-1.25,4.5) 34(-1.75,4.5) 35(-2.25,4.5) 36(-2.75,4.5)
  rect 1.397x0.229 smd: 13(4.5,-2.75) 14(4.5,-2.25) 15(4.5,-1.75) 16(4.5,-1.25) 17(4.5,-0.75) 18(4.5,-0.25) 19(4.5,0.25) 20(4.5,0.75) 21(4.5,1.25) 22(4.5,1.75) 23(4.5,2.25) 24(4.5,2.75) 37(-4.5,2.75) 38(-4.5,2.25) 39(-4.5,1.75) 40(-4.5,1.25) 41(-4.5,0.75) 42(-4.5,0.25) 43(-4.5,-0.25) 44(-4.5,-0.75) 45(-4.5,-1.25) 46(-4.5,-1.75) 47(-4.5,-2.25) 48(-4.5,-2.75)
MH150
  round 3.048 hole 3.048 unplated: (0,0)
MH250C120D
  round 6.35 hole 3.048: 1(0,0)
PQFP44
  rect 1.27x0.483 smd: 1(-6.248,4.064) 2(-6.248,3.251) 3(-6.248,2.438) 4(-6.248,1.626) 5(-6.248,0.813) 6(-6.248,0) 7(-6.248,-0.813) 8(-6.248,-1.626) 9(-6.248,-2.438) 10(-6.248,-3.251) 11(-6.248,-4.064) 23(6.248,-4.064) 24(6.248,-3.251) 25(6.248,-2.438) 26(6.248,-1.626) 27(6.248,-0.813) 28(6.248,0) 29(6.248,0.813) 30(6.248,1.626) 31(6.248,2.438) 32(6.248,3.251) 33(6.248,4.064)
  rect 0.483x1.27 smd: 12(-4.064,-6.248) 13(-3.251,-6.248) 14(-2.438,-6.248) 15(-1.626,-6.248) 16(-0.813,-6.248) 17(0,-6.248) 18(0.813,-6.248) 19(1.626,-6.248) 20(2.438,-6.248) 21(3.251,-6.248) 22(4.064,-6.248) 34(4.064,6.248) 35(3.251,6.248) 36(2.438,6.248) 37(1.626,6.248) 38(0.813,6.248) 39(0,6.248) 40(-0.813,6.248) 41(-1.626,6.248) 42(-2.438,6.248) 43(-3.251,6.248) 44(-4.064,6.248)
R0603
  rect 0.762x0.965 smd: 1(-0.826,0) 2(0.826,0)
R0805
  rect 1.422x1.397 smd: 1(0,0) 2(0,-1.905)
R1210
  rect 2.667x1.6 smd: 1(-0.025,1.854) 2(0,-1.778)
RC0603
  rect 0.965x1.016 smd: 1(-0.94,0.025) 2(0.889,0)
RJ45_HY
  round 3.556 hole 3.556 unplated: (6.096,10.287) (6.096,-1.016)
  round 1.524 hole 0.94: 1(0,0) 2(-2.54,1.27) 3(0,2.54) 4(-2.54,3.81) 5(0,5.08) 6(-2.54,6.35) 7(0,7.62) 8(-2.54,8.89)
  round 1.524 hole 1.194: 9(10.211,-1.549) 10(10.211,0.991) 11(10.211,8.56) 12(10.211,11.1)
  round 2.286 hole 1.651: 13(2.286,-3.175) 14(2.286,12.7)
SD-PROA
  round 1.905 hole 1.905 unplated: (1.702,-2.54) (25.4,-2.54)
  rect 1.295x2.794 smd: 1(20.472,22.098) 2(18.44,22.098) 4(12.954,22.098) 5(10.566,22.098) 6(8.077,22.098) 7(5.74,22.098) 8(3.81,22.098) 9(22.708,22.098)
  rect 1.016x2.54 smd: 3(14.884,22.098) 15(16.51,22.098)
  rect 2.4x2.8 smd: 10(0,0) 12(28.092,1.245)
  rect 1.6x2.591 smd: 11(0.66,22.098)
SOD123
  rect 1.27x1.27 smd: 1(1.473,0) 2(-1.473,0)
SOP8
  rect 1.016x1.524 smd: 1(-0.152,-0.254) 4(3.988,-0.254) 5(3.988,5.588) 8(-0.178,5.588)
  rect 0.635x1.524 smd: 2(1.27,-0.254) 3(2.54,-0.254) 6(2.54,5.588) 7(1.27,5.588)
SOP16
  rect 0.61x1.524 smd: 1(0,0) 2(1.27,0) 3(2.54,0) 4(3.81,0) 5(5.08,0) 6(6.35,0) 7(7.62,0) 8(8.89,0) 9(8.89,5.461) 10(7.62,5.461) 11(6.35,5.461) 12(5.08,5.461) 13(3.81,5.461) 14(2.54,5.461) 15(1.27,5.461) 16(0,5.461)
SOT23
  rect 1.016x1.397 smd: 1(0.965,1.168) 2(-0.94,1.168) 3(0,-1.181)
SOT23-4
  rect 0.635x1.016 smd: 1(-0.953,-1.346) 2(0.94,-1.346) 3(0.94,1.346) 4(-0.94,1.346)
SOT23-6
  rect 0.635x1.016 smd: 1(-0.953,-1.346) 2(0,-1.346) 3(0.953,-1.346) 4(0.953,1.346) 5(0,1.359) 6(-0.953,1.346)
SOT-223
  rect 1.194x1.956 smd: 1(-2.337,-0.051) 2(0.076,-0.051) 3(2.311,-0.025)
  rect 3.81x1.27 smd: 4(0,6.477)
SSOP16
  oval 1.778x0.33 smd: 1(-2.603,2.223) 2(-2.603,1.587) 3(-2.603,0.953) 4(-2.603,0.318) 5(-2.603,-0.318) 6(-2.603,-0.953) 7(-2.603,-1.587) 8(-2.603,-2.223) 9(2.603,-2.223) 10(2.603,-1.587) 11(2.603,-0.953) 12(2.603,-0.318) 13(2.603,0.318) 14(2.603,0.953) 15(2.603,1.587) 16(2.603,2.223)
TEST55
  round 2.286 smd: 1(0,0)
TO263
  rect 1.194x2.642 smd: 1(0,0) 2(1.702,0) 3(3.404,0) 4(5.105,0) 5(6.807,0)
  rect 10.16x10.16 smd: 6(3.404,9.906)
TSOP48
  rect 0.254x1.524 smd: 1(-5.751,-9.799) 2(-5.25,-9.799) 3(-4.75,-9.799) 4(-4.249,-9.799) 5(-3.749,-9.799) 6(-3.251,-9.799) 7(-2.751,-9.799) 8(-2.25,-9.799) 9(-1.75,-9.799) 10(-1.25,-9.799) 11(-0.749,-9.799) 12(-0.249,-9.799) 13(0.249,-9.799) 14(0.749,-9.799) 15(1.25,-9.799) 16(1.75,-9.799) 17(2.25,-9.799) 18(2.751,-9.799) 19(3.251,-9.799) 20(3.749,-9.799) 21(4.249,-9.799) 22(4.75,-9.799) 23(5.25,-9.799) 24(5.751,-9.799) 25(5.751,9.799) 26(5.25,9.799) 27(4.75,9.799) 28(4.249,9.799) 29(3.749,9.799) 30(3.251,9.799) 31(2.751,9.799) 32(2.25,9.799) 33(1.75,9.799) 34(1.25,9.799) 35(0.749,9.799) 36(0.249,9.799) 37(-0.249,9.799) 38(-0.749,9.799) 39(-1.25,9.799) 40(-1.75,9.799) 41(-2.25,9.799) 42(-2.751,9.799) 43(-3.251,9.799) 44(-3.749,9.799) 45(-4.249,9.799) 46(-4.75,9.799) 47(-5.25,9.799) 48(-5.751,9.799)
TSOP54-II
  rect 0.305x1.473 smd: 1(-10.4,-6) 2(-9.6,-6) 3(-8.8,-6) 4(-8,-6) 5(-7.2,-6) 6(-6.4,-6) 7(-5.6,-6) 8(-4.8,-6) 9(-4,-6) 10(-3.2,-6) 11(-2.4,-6) 12(-1.6,-6) 13(-0.8,-6) 14(0,-6) 15(0.8,-6) 16(1.6,-6) 17(2.4,-6) 18(3.2,-6) 19(4,-6) 20(4.8,-6) 21(5.6,-6) 22(6.4,-6) 23(7.2,-6) 24(8,-6) 25(8.8,-6) 26(9.6,-6) 27(10.4,-6) 28(10.4,6) 29(9.6,6) 30(8.8,6) 31(8,6) 32(7.2,6) 33(6.4,6) 34(5.6,6) 35(4.8,6) 36(4,6) 37(3.2,6) 38(2.4,6) 39(1.6,6) 40(0.8,6) 41(0,6) 42(-0.8,6) 43(-1.6,6) 44(-2.4,6) 45(-3.2,6) 46(-4,6) 47(-4.8,6) 48(-5.6,6) 49(-6.4,6) 50(-7.2,6) 51(-8,6) 52(-8.8,6) 53(-9.6,6) 54(-10.4,6)
TSSOP48
  rect 1.702x0.279 smd: 1(-4.05,5.75) 2(-4.05,5.25) 3(-4.05,4.75) 4(-4.05,4.25) 5(-4.05,3.75) 6(-4.05,3.25) 7(-4.05,2.75) 8(-4.05,2.25) 9(-4.05,1.75) 10(-4.05,1.25) 11(-4.05,0.75) 12(-4.05,0.25) 13(-4.05,-0.25) 14(-4.05,-0.75) 15(-4.05,-1.25) 16(-4.05,-1.75) 17(-4.05,-2.25) 18(-4.05,-2.75) 19(-4.05,-3.25) 20(-4.05,-3.75) 21(-4.05,-4.25) 22(-4.05,-4.75) 23(-4.05,-5.25) 24(-4.05,-5.75) 25(4.05,-5.75) 26(4.05,-5.25) 27(4.05,-4.75) 28(4.05,-4.25) 29(4.05,-3.75) 30(4.05,-3.25) 31(4.05,-2.75) 32(4.05,-2.25) 33(4.05,-1.75) 34(4.05,-1.25) 35(4.05,-0.75) 36(4.05,-0.25) 37(4.05,0.25) 38(4.05,0.75) 39(4.05,1.25) 40(4.05,1.75) 41(4.05,2.25) 42(4.05,2.75) 43(4.05,3.25) 44(4.05,3.75) 45(4.05,4.25) 46(4.05,4.75) 47(4.05,5.25) 48(4.05,5.75)
TSSOP56
  rect 1.778x0.254 smd: 1(-4,6.749) 2(-4,6.251) 3(-4,5.751) 4(-4,5.25) 5(-4,4.75) 6(-4,4.249) 7(-4,3.749) 8(-4,3.251) 9(-4,2.751) 10(-4,2.25) 11(-4,1.75) 12(-4,1.25) 13(-4,0.749) 14(-4,0.249) 15(-4,-0.249) 16(-4,-0.749) 17(-4,-1.25) 18(-4,-1.75) 19(-4,-2.25) 20(-4,-2.751) 21(-4,-3.251) 22(-4,-3.749) 23(-4,-4.249) 24(-4,-4.75) 25(-4,-5.25) 26(-4,-5.751) 27(-4,-6.251) 28(-4,-6.749) 29(4,-6.749) 30(4,-6.251) 31(4,-5.751) 32(4,-5.25) 33(4,-4.75) 34(4,-4.249) 35(4,-3.749) 36(4,-3.251) 37(4,-2.751) 38(4,-2.25) 39(4,-1.75) 40(4,-1.25) 41(4,-0.749) 42(4,-0.249) 43(4,0.249) 44(4,0.749) 45(4,1.25) 46(4,1.75) 47(4,2.25) 48(4,2.751) 49(4,3.251) 50(4,3.749) 51(4,4.249) 52(4,4.75) 53(4,5.25) 54(4,5.751) 55(4,6.251) 56(4,6.749)
unnamed
  round 1.524 smd: 1(0,0)
unnamed#2
  round 1.321 hole 0.813: 1(0,0)
USB_B_VERTICAL
  round 1.778 hole 0.94: 1(2.362,3.048) 2(0,3.048) 3(0,0) 4(2.362,0)
  round 3.607 hole 2.489: 5(7.277,0.889) 6(-4.915,0.889)
USBAH
  round 1.778 hole 0.94: 1(0,-3.5) 4(0,3.5)
  round 1.321 hole 0.889: 2(0,-1) 3(0,1)
  round 3.607 hole 2.489: 5(2.71,6.6) 6(2.71,-6.6)

## Nets
5V: BUZZER.1 C11.1 C12.1 C84.1 CB1.1 F1.2 HOSTA.1 I/OPROT1.19(NC1) I/OPROT1.20(NC2) L7.2 T57.1 T76.1 U38.3(IN) U39.3(IN) U42.6(IN) UU1.5(VP) UU2.5(VP)
24V: C8.1 C13.1 C63.1 D10.2 L14.2 U8.1(VIN)
AGND: C64.2 C65.2 C66.2 C67.2 C68.2 C69.2 C70.2 C71.2 L12.2 U49.6(GND)
GND: BT1.2(-) C1.2 C2.2 C3.2 C4.2 C5.2 C7.2 C9.2 C10.2 C11.2 C12.2 C13.2 C14.2 C15.2 C16.2 C17.2 C18.2 C19.2 C20.2 C21.2 C22.2 C23.2 C24.2 C25.2 C26.2 C27.2 C28.2 C29.2 C30.2 C31.2 C32.2 C33.2 C34.2 C35.2 C36.2 C37.2 C38.2 C39.2 C40.2 C41.2 C42.2 C43.2 C44.2 C45.2 C46.2 C47.2 C49.2 C50.2 C51.2 C52.2 C54.2 C58.2 C60.2 C61.2 C62.2 C63.2 C73.1 C74.1 C77.1 C78.2 C79.2 C80.2 C81.2 C82.2 C83.2 C84.2 C85.2 C87.2 C88.1 C90.1 C91.1 C94.2 C95.2 CB1.2 CB2.2 CON1.8(GND) CON1.10(DGND) D3.1 D10.1 D11.1 HOSTA.4 I/OPROT1.17(D1) I/OPROT1.18(D0) J24.3(GND) J24.6(GND1) J24.10(SHELLB) J24.12(SHELLA) L10.2 L12.1 L14.4 LAN1.8 LVDS1.4(NC2) LVDS1.5(GND1) LVDS1.6(GND#6) LVDS1.13(GND#13) LVDS1.14(GND#14) LVDS1.20(NC6) Q2.2 R2.1 R3.2 R7.1 R21.1 R22.2 R24.2 R26.1 R29.2 R30.1 R56.1 R62.2 R63.1 RS485.5 RU1.1 RU2.1 SLAVE.4 SN75LVDS83B1.2(D5) SN75LVDS83B1.5(GND#5) SN75LVDS83B1.8(D10) SN75LVDS83B1.10(D11) SN75LVDS83B1.13(GND#13) SN75LVDS83B1.16(D16) SN75LVDS83B1.18(D17) SN75LVDS83B1.21(GND#21) SN75LVDS83B1.25(D23) SN75LVDS83B1.29(GND#29) SN75LVDS83B1.33(GND#33) SN75LVDS83B1.35(GND#35) SN75LVDS83B1.36(GND#36) SN75LVDS83B1.43(GND#43) SN75LVDS83B1.49(GND#49) SN75LVDS83B1.50(D27) SN75LVDS83B1.53(GND#53) T9.1 T56.1 T59.1 T90.1 U1.4(GND1) U1.10(GND2) U1.15(GND3) U1.21(GND4) U1.25(2\O\E\) U1.28(GND5) U1.34(GND6) U1.39(GND7) U1.45(GND8) U1.48(1\O\E\) U8.3(GND) U8.5(ON/OFF) U8.6(PAD) U18.5(RXGND1) U18.6(TXGND) U18.15(GND1) U18.33(GND2) U18.41(TEST) U18.45(GND3) U18.47(RXGND2) U18.48(BGGND) U19.15(GND) U36.5(GND) U37.15(GND) U38.1 U39.1 U42.2(GND) U45.16(VSSDE1) U45.28(VSSDI) U45.30(VSSDA) U45.35(VSSDE2) U45.37(TCK) U51.A3(VSSI0) U51.A4(VSSI1) U51.A5(VSSMOP0) U51.A7(VSSMOP1) U51.A11(VSSMOP2) U51.A12(VSSI2) U51.A15(VSSMOP3) U51.B1(VSSMOP4) U51.B10(VSSI3) U51.B13(VSSMOP5) U51.C17(VSSI4) U51.D16(VSSMOP6) U51.D17(VSSMOP7) U51.E2(VSSMOP8) U51.F2(VSSI5) U51.G1(VSSOP0) U51.G17(VSSI6) U51.H1(VSSIARM0) U51.H11(VSSOP1) U51.K1(VSSIARM6) U51.M12(VSSA_UPLL) U51.N1(VSSOP2) U51.P13(OM2) U51.R13(OM1) U51.R17(VSSA_MPLL) U51.T1(VSSIARM1) U51.T2(VSSIARM2) U51.T13(OM3) U51.T14(VSSA_ADC) U51.U3(VSSOP3) U51.U4(VSSIARM3) U51.U7(VSSIARM4) U51.U9(VSSOP4) U51.U10(VSSIARM5) U51.U15(VSSOP5) U52.1(GND) U54.6(VSSQ0) U54.12(VSSQ1) U54.28(VSS0) U54.41(VSS1) U54.46(VSSQ2) U54.52(VSSQ3) U54.54(VSS2) U55.6(VSSQ0) U55.12(VSSQ1) U55.28(VSS0) U55.41(VSS1) U55.46(VSSQ2) U55.52(VSSQ3) U55.54(VSS2) U56.13(VSS1) U56.36(VSS) UART0.1 UART1.5 UART3.5 UNK57TFT.8 UNK57TFT.15 UNK57TFT.22 UNK57TFT.29 UNK57TFT.33 UNK57TFT.34 UNK57TFT.35 UU1.2(VN) UU2.2(VN)
VDD1V3: C5.1 C25.1 C26.1 C27.1 C28.1 C29.1 C30.1 R6.1 T2.1 U51.A1(VDDI0) U51.A6(VDDI1) U51.A10(VDDI2) U51.A16(VDDI3) U51.B11(VDDI4) U51.F1(VDDI5) U51.F16(VDDI6) U51.G4(VDDALIVE0) U51.J2(VDDIARM0) U51.J17(VDDALIVE1) U51.L2(VDDIARM1) U51.M13(VDDA_UPLL) U51.N16(VDDA_MPLL) U51.T6(VDDIARM2) U51.T8(VDDIARM3) U51.U1(VDDIARM4) U51.U2(VDDIARM5) U51.U11(VDDI7) U53.2(OUT) U53.4
VDD_IO: C2.1 C3.1 C4.1 C16.1 C19.1 C20.1 C21.1 C22.1 C23.1 C24.1 C31.1 C32.1 C33.1 C34.1 C35.1 C36.1 C37.1 C38.1 C39.1 C40.1 C41.1 C42.1 C43.1 C44.1 C49.1 C50.1 C54.1 C58.1 C60.1 C61.1 C82.1 C83.1 C85.1 CON1.1(VCC) CON1.2(VDD) DB1.1 J24.4(VDD) L8.1 R1.1 R16.1 R17.2 R18.1 R19.1 R20.1 R23.2 R31.1 R32.1 R33.1 R34.1 R35.1 R36.1 R38.1 R41.2 R42.2 R43.2 R44.2 R46.2 R47.1 R49.1 R50.2 R51.2 R52.2 R53.2 R54.2 R55.1 R59.2 T1.1 U1.7(VCCB1) U1.18(VCCB2) U1.31(VCCA1) U1.42(VCCA2) U19.16(VCC) U36.8(VCC) U37.16(VCC) U38.2(OUT) U38.4 U45.3(VDDA1) U45.10(VDDA0) U45.18(VDDE1) U45.29(VDDI) U45.33(VDDA) U45.34(VDDE2) U45.42(VDDA2) U51.A9(VDDMOP0) U51.B6(VDDMOP1) U51.B12(VDDMOP2) U51.B14(VDDMOP3) U51.B16(VDDMOP4) U51.C1(VDDMOP5) U51.F17(VDDMOP6) U51.H12(EXTCLK) U51.J1(VDDOP0) U51.K12(VDDOP3) U51.P14(VDDA_ADC) U51.T3(VDDOP1) U51.T12(VDDOP2) U52.4(VCC) U53.3(IN) U54.1(VDD0) U54.3(VDDQ0) U54.9(VDDQ1) U54.14(VDD1) U54.27(VDD2) U54.43(VDDQ2) U54.49(VDDQ3) U55.1(VDD0) U55.3(VDDQ0) U55.9(VDDQ1) U55.14(VDD1) U55.27(VDD2) U55.43(VDDQ2) U55.49(VDDQ3) U56.12(VCC1) U56.37(VCC)
VDD_RTC: C45.1 DB1.2 DB2.2 T3.1 U51.N15(VDD_RTC)
ADDR0: U51.F7(ADDR0/GPA0)
ADDR1: U51.E7(ADDR1)
ADDR2: U18.32(CMD) U51.B7(ADDR2) U54.23(A0) U55.23(A0)
ADDR3: U51.F8(ADDR3) U54.24(A1) U55.24(A1)
ADDR4: U51.C7(ADDR4) U54.25(A2) U55.25(A2)
ADDR5: U51.D8(ADDR5) U54.26(A3) U55.26(A3)
ADDR6: U51.E8(ADDR6) U54.29(A4) U55.29(A4)
ADDR7: U51.D7(ADDR7) U54.30(A5) U55.30(A5)
ADDR8: U51.G8(ADDR8) U54.31(A6) U55.31(A6)
ADDR9: U51.B8(ADDR9) U54.32(A7) U55.32(A7)
ADDR10: U51.A8(ADDR10) U54.33(A8) U55.33(A8)
ADDR11: U51.C8(ADDR11) U54.34(A9) U55.34(A9)
ADDR12: U51.B9(ADDR12) U54.22(A10) U55.22(A10)
ADDR13: U51.H8(ADDR13) U54.35(A11) U55.35(A11)
ADDR14: U51.E9(ADDR14) U54.36(A12) U55.36(A12)
ADDR15: U51.C9(ADDR15)
ADDR16: U51.D9(ADDR16/GPA1)
ADDR17: U51.G9(ADDR17/GPA2)
ADDR18: U51.F9(ADDR18/GPA3)
ADDR19: U51.H9(ADDR19/GPA4)
ADDR20: U51.D10(ADDR20/GPA5)
ADDR21: U51.C10(ADDR21/GPA6)
ADDR22: U51.H10(ADDR22/GPA7)
ADDR23: U51.E10(ADDR23/GPA8)
ADDR24: U51.C11(ADDR24/GPA9) U54.20(BA0) U55.20(BA0)
ADDR25: U51.G10(ADDR25/GPA10) U54.21(BA1) U55.21(BA1)
ADDR26: U51.D11(ADDR26/GPA11)
AI21: U45.43(AI21)
AI22: U45.1(AI22)
AIN0: U51.R14(AIN0)
AIN1: U51.U17(AIN1)
AIN2: U51.R15(AIN2)
AIN3: U51.P15(AIN3)
AIN4/TSYM: R14.2 U51.T16(AIN4/TSYM)
AIN5/TSYP: R12.2 U51.T17(AIN5/TSYP)
AIN6/TSXM: R15.2 U51.R16(AIN6/TSXM)
AIN7/TSXP: R13.2 U51.P16(AIN7/TSXP)
ALE: U51.D1(ALE/GPA18) U56.17(ALE)
BACK-BATT: BT1.1(+) DB2.1 T82.1
CAMCLKOUT: U51.J3(CAMCLKOUT/GPJ11)
CAMDATA0: U45.22(VPO0) U51.H6(CAMDATA0/GPJ0)
CAMDATA1: U45.21(VPO1) U51.G3(CAMDATA1/GPJ1)
CAMDATA2: U45.20(VPO2) U51.H5(CAMDATA2/GPJ2)
CAMDATA3: U45.19(VPO3) U51.H4(CAMDATA3/GPJ3)
CAMDATA4: U45.15(VPO4) U51.H3(CAMDATA4/GPJ4)
CAMDATA5: U45.14(VPO5) U51.H7(CAMDATA5/GPJ5)
CAMDATA6: U45.13(VPO6) U51.J8(CAMDATA6/GPJ6)
CAMDATA7: U45.12(VPO7) U51.H2(CAMDATA7/GPJ7)
CAMHREF: R60.1 U51.G2(CAMHREF/GPJ10)
CAMPCLK: U45.17(LLC) U51.G5(CAMPCLK/GPJ8)
CAMRESET: U51.J4(CAMRESET/GPJ12)
CAMVSYNC: U45.27(RTS1) U51.G7(CAMVSYNC/GPJ9)
CDCLK: U51.T7(CDCLK/AC_NRESET)
CLE: U51.F5(CLE/GPA17) U56.16(CLE)
CLKOUT0: U51.R9(CLKOUT0/GPH9)
CLKOUT1: U51.P10(CLKOUT1/GPH10)
CLKOUTM: LVDS1.15(CLK-) SN75LVDS83B1.40(CLKOUTM) T97.1
CLKOUTP: LVDS1.16(CLK+) SN75LVDS83B1.39(CLKOUTP) T98.1
DATA0: U18.18(SD0) U51.D12(DATA0) U54.2(DQ0) U56.29(I/O0)
DATA1: U18.17(SD1) U51.C12(DATA1) U54.4(DQ1) U56.30(I/O1)
DATA2: U18.16(SD2) U51.E11(DATA2) U54.5(DQ2) U56.31(I/O2)
DATA3: U18.14(SD3) U51.A13(DATA3) U54.7(DQ3) U56.32(I/O3)
DATA4: U18.13(SD4) U51.F10(DATA4) U54.8(DQ4) U56.41(I/O4)
DATA5: U18.12(SD5) U51.F11(DATA5) U54.10(DQ5) U56.42(I/O5)
DATA6: U18.11(SD6) U51.C13(DATA6) U54.11(DQ6) U56.43(I/O6)
DATA7: U18.10(SD7) U51.A14(DATA7) U54.13(DQ7) U56.44(I/O7)
DATA8: U18.31(SD8) U51.D13(DATA8) U54.42(DQ8)
DATA9: U18.29(SD9) U51.B15(DATA9) U54.44(DQ9)
DATA10: U18.28(SD10) U51.A17(DATA10) U54.45(DQ10)
DATA11: U18.27(SD11) U51.C14(DATA11) U54.47(DQ11)
DATA12: U18.26(SD12) U51.D15(DATA12) U54.48(DQ12)
DATA13: U18.25(SD13) U51.C15(DATA13) U54.50(DQ13)
DATA14: U18.24(SD14) U51.D14(DATA14) U54.51(DQ14)
DATA15: U18.22(SD15) U51.B17(DATA15) U54.53(DQ15)
DATA16: U51.C16(DATA16) U55.2(DQ0)
DATA17: U51.E15(DATA17) U55.4(DQ1)
DATA18: U51.E14(DATA18) U55.5(DQ2)
DATA19: U51.E13(DATA19) U55.7(DQ3)
DATA20: U51.E12(DATA20) U55.8(DQ4)
DATA21: U51.E16(DATA21) U55.10(DQ5)
DATA22: U51.F15(DATA22) U55.11(DQ6)
DATA23: U51.G13(DATA23) U55.13(DQ7)
DATA24: U51.E17(DATA24) U55.42(DQ8)
DATA25: U51.G12(DATA25) U55.44(DQ9)
DATA26: U51.F14(DATA26) U55.45(DQ10)
DATA27: U51.F12(DATA27) U55.47(DQ11)
DATA28: U51.G11(DATA28) U55.48(DQ12)
DATA29: U51.G16(DATA29) U55.50(DQ13)
DATA30: U51.H13(DATA30) U55.51(DQ14)
DATA31: U51.F13(DATA31) U55.53(DQ15)
DN0: RU2.2 RUN.2 U51.P12(DN0)
DN1: RDM.2 U51.N12(DN1/PDN0)
DP0: RU1.2 RUP.2 U51.N11(DP0)
DP1: RDP.2 U51.U14(DP1/PDP0)
EINT0: U1.12(1B8) U51.N17(EINT0/GPF0)
EINT1: U1.11(1B7) U51.M16(EINT1/GPF1)
EINT2: U1.9(1B6) U51.L13(EINT2/GPF2)
EINT3: U1.8(1B5) U51.M15(EINT3/GPF3)
EINT4: U1.6(1B4) U51.M17(EINT4/GPF4)
EINT5/GPF5: U1.5(1B3) U51.L14(EINT5/GPF5)
EINT6/GPF6: U1.3(1B2) U51.L15(EINT6/GPF6)
EINT7/GPF7: U18.34(INT) U51.L16(EINT7/GPF7)
EINT8: U51.N9(EINT8/GPG0)
EINT9: R54.1 U49.11(P\E\N\I\R\Q\) U51.T9(EINT9/GPG1)
EINT16: R39.1 U51.T10(EINT16/GPG8)
EINT17/GPG9: R25.1 U51.M11(EINT17/GPG9)
EINT18/NCD_SD: R40.1 U51.N10(EINT18/GPG10)
GPB0/TOUT0: R3.1 R48.1 U51.J6(TOUT0/GPB0)
GPB1/TOUT1: R5.1 U51.J5(TOUT1/GPB1)
GPB2/L3MODE: U51.J7(TOUT2/GPB2)
GPB3/L3DATA: U1.13(2B1) U51.K3(TOUT3/GPB3)
GPB4/L3CLOCK: U1.14(2B2) U51.K4(TCLK0/GPB4)
GPB5: U1.16(2B3) U51.K2(NXBACK/GPB5)
GPB6: U1.17(2B4) U51.L5(NXBREQ/GPB6)
GPB7: U1.19(2B5) U51.K7(NXDACK1/GPB7)
GPB8: U1.20(2B6) U51.K5(NXDREQ1/GPB8)
GPB9: U1.22(2B7) U51.L3(NXDACK0/GPB9)
GPB10: U1.23(2B8) U51.K6(NXDREQ0/GPB10)
GPE11: R52.1 U49.14(DIN) U51.K9(SPIMISO0/GPE11)
GPE12: R53.1 U49.12(DOUT) U51.P9(SPIMOSI0/GPE12)
GPE13: R51.1 U49.16(DCLK) U51.L9(SPICLK0/GPE13)
GPG2/EINT10: R50.1 U49.15(C\S\) U51.J10(NSS0/EINT10/GPG2)
GPG3/EINT11: U51.R10(NSS1/EINT11/GPG3)
GPG5/EINT13: R11.1 U51.K10(SPIMISO1/EINT13/GPG5)
GPG6/EINT14: U51.R11(SPIMOSI1/EINT14/GPG6)
GPG7/EINT15: R10.1 U51.L10(EINT15/SPICLK1/GPG7)
GPG11/EINT19: U36.2(R\E\) U36.3(DE) U51.U12(TCLK1/EINT19/GPG11)
GPG12/EINT20: U1.2(1B1) U51.M10(EINT20/GPG12)
GPG13/EINT21: R24.1 U51.T11(EINT21/GPG13)
GPG14/EINT22: R23.1 U51.L11(EINT22/GPG14)
GPG15/EINT23: R22.1 U51.U13(EINT23/GPG15)
HSYNC: SN75LVDS83B1.27(D24) T22.1 U51.M1(VLINE/GPC2) UNK57TFT.31
I2CSCL: U45.24(SCL) U51.U8(IICSCL/GPE14)
I2CSDA: U45.23(SDA) U51.M9(IICSDA/GPE15)
I2SLRCK: U51.P7(I2SLRCK/AC_SYNC)
I2SSCLK: U51.R7(I2SSCLK/AC_BIT_CLK)
I2SSD0: U51.U6(I2SSDO/AC_SDATA_OUT)
I2SSDI: U51.L8(I2SSDI/AC_SDATA_IN)
INPUT1: I/OPROT1.9(FRM) T65.1 U1.37(1A8)
INPUT2: I/OPROT1.10(CP) T66.1 U1.38(1A7)
INPUT3: I/OPROT1.11(DF) T64.1 U1.40(1A6)
INPUT4: I/OPROT1.12(LOAD) T63.1 U1.41(1A5)
INPUT5: I/OPROT1.13(ON/OFF) T61.1 U1.43(1A4)
INPUT6: I/OPROT1.14(GND1) T62.1 U1.44(1A3)
INPUT7: I/OPROT1.15(D3) T60.1 U1.46(1A2)
INPUT8: I/OPROT1.16(D2) T58.1 U1.47(1A1)
LAN_2V5: C15.1 C78.1 LAN1.3 LAN1.5 T12.1 U18.2(RXVDD25) U18.9(TXVDD25)
LAN_3V3: C81.1 L8.2 R8.1 R9.1 U18.23(VDD1) U18.30(VDD2) U18.42(VDD3)
LCD3V3: C94.1 C95.1 CB2.1 LVDS1.1(VDD#1) LVDS1.2(VDD#2) R64.2 SN75LVDS83B1.1(IOVCC#1) SN75LVDS83B1.9(VCC) SN75LVDS83B1.26(IOVCC#26) SN75LVDS83B1.34(PLLVCC) SN75LVDS83B1.44(LVDSVCC) T81.1 T89.1 U39.2(OUT) U39.4 UNK57TFT.5 UNK57TFT.6
LCD_PWREN: U51.P11(LCD_PWREN/EINT12/GPG4)
LCDVF0: U51.M3(LCD_LPCOE/GPC5)
LCDVF1: U51.M2(LCD_LPCRE/GPC6)
LCDVF2: U51.P1(LCD_LPCREVB/GPC7)
LED1: LAN1.11 T17.1 U18.39(LED1)
LED2: LAN1.10 T16.1 U18.38(LED2)
LEND: U51.L1(LEND/GPC0)
NC1: LVDS1.3(NC1)
NC5: LVDS1.19(NC5)
NCON: R29.1 U51.R12(NCON)
NCTS0: U51.K11(NCTS0/GPH0)
NCTS1/RXD2: U36.1(RO) U37.9(R2OUT) U51.J15(RXD2/NCTS1/GPH7)
NFCE: U51.F4(NFCE/GPA22) U56.9(\\\\\\CE1)
NFRE: U51.E1(NFRE/GPA20) U56.8(\\\\RE)
NFWE: U51.F3(NFWE/GPA19) U56.18(\\\\WE)
NGCS0: U51.F6(NGCS0)
NGCS1: U51.B2(NGCS1/GPA12)
NGCS2: U51.C3(NGCS2/GPA13)
NGCS3: U51.C4(NGCS3/GPA14)
NGCS4: U18.37(CS#) U51.D3(NGCS4/GPA15)
NGCS5: U51.C2(NGCS5/GPA16)
NGCS6: U51.D2(NGCS6:NSCS0) U54.19(NSCS) U55.19(NSCS)
NGCS7: U51.E3(NGCS7:NSCS1)
NOE: U18.35(IOR#) U51.C5(NOE)
NRESET: CON1.4(NRESET) R45.2 T87.1 U18.40(PWRST#) U51.H16(NRESET) U52.2(RESET)
NRESET_IN: R17.1 U52.3(MR)
NRSTOUT/GPA21: U51.N13(NRSTOUT/GPA21)
NRTS0: U51.L17(NRTS0/GPH1)
NRTS1/TXD2: U36.4(DI) U37.10(T2IN) U51.J11(TXD2/NRTS1/GPH6)
NSCAS: U51.D6(NSCAS) U54.17(NSCAS) U55.17(NSCAS)
NSRAS: U51.C6(NSRAS) U54.18(NSRAS) U55.18(NSRAS)
NTRST: CON1.3(NTRST) R44.1 R45.1 T83.1 U51.H15(NTRST)
NWAIT: R47.2 U51.E4(NWAIT)
NWBE0: U51.D4(NBE0:NWBE0:DQM0) U54.15(LDQM)
NWBE1: U51.B5(NBE1:NWBE1:DQM1) U54.39(UDQM)
NWBE2: U51.D5(NBE2:NWBE2:DQM2) U55.15(LDQM)
NWBE3: U51.E5(NBE3:NWBE3:DQM3) U55.39(UDQM)
NWE: U18.36(IOW#) U51.E6(NWE) U54.16(NWE) U55.16(NWE)
OM0: R46.1 U51.T15(OM0)
OUT1: I/OPROT1.1(VEE) T74.1 U1.26(2A8)
OUT2: I/OPROT1.2(V2) T72.1 U1.27(2A7)
OUT3: I/OPROT1.3(V3) T73.1 U1.29(2A6)
OUT4: I/OPROT1.4(V4) T71.1 U1.30(2A5)
OUT5: I/OPROT1.5(V5) T70.1 U1.32(2A4)
OUT6: I/OPROT1.6(VGND) T68.1 U1.33(2A3)
OUT7: I/OPROT1.7(GND) T69.1 U1.35(2A2)
OUT8: I/OPROT1.8(VDD5) T67.1 U1.36(2A1)
PDN0: HOSTA.2 RUN.1 T78.1 UU2.1(I/O1)
PDN1: R26.2 RDM.1 SLAVE.2 T75.1 UU1.1(I/O1)
PDP0: HOSTA.3 RUP.1 T80.1 UU2.6(I/O2)
PDP1: R25.2 RDP.1 SLAVE.3 T77.1 UU1.6(I/O2)
RNB: R19.2 U51.G6(FRNB) U56.7(R/B\\\\1)
RS485_A: R65.2 RS485.1 T100.1 U36.6(A)
RS485_B: R65.1 R66.1 T99.1 U36.7(B)
RXD0: U19.12(R1OUT) U51.K14(RXD0/GPH3)
RXD1: U37.12(R1OUT) U51.K17(RXD1/GPH5)
RXN: LAN1.7 R28.2 T14.1 U18.4(RX-)
RXP: LAN1.6 R37.2 T13.1 U18.3(RX+)
SCKE: U51.A2(SCKE) U54.37(SCKE) U55.37(SCKE)
SCLK0: U51.B4(SCLK0) U54.38(SCLK)
SCLK1: U51.B3(SCLK1) U55.38(SCLK)
SDCLK: J24.5(CLK) U51.N8(SDCLK/GPE5)
SDCMD: J24.2(CMD) R36.2 U51.K8(SDCMD/GPE6)
SDDATA0: J24.7(DAT0) R35.2 U51.R8(SDDATA0/GPE7)
SDDATA1: J24.8(DAT1) R34.2 U51.M8(SDDAT1/GPE8)
SDDATA2: J24.9(DAT2) R38.2 U51.P8(SDDATA2/GPE9)
SDDATA3: J24.1(CD/DATA3) R33.2 U51.J9(SDDAT3/GPE10)
SHELL: C8.2 C62.1 HOSTA.5 HOSTA.6 LAN1.13 LAN1.14 RS485.10 RS485.11 SLAVE.5 SLAVE.6 UART1.10 UART1.11 UART2.10 UART2.11 UART3.10 UART3.11 UNK12V.1
TCK: CON1.9(TCK) R41.1 T86.1 U51.J13(TCK)
TDI: CON1.5(TDI) R43.1 T84.1 U51.H17(TDI)
TDO: CON1.6(TDO) T88.1 U51.J16(TDO)
TFT-LED+: C77.2 D9.2 H1.1 T44.1 U42.5(OV)
TFT-LED-: H1.2 R56.2 T45.1 U42.3(FB)
TMS: CON1.7(TMS) R42.1 T85.1 U51.J14(TMS)
TXD0: U19.11(T1IN) U51.K13(TXD0/GPH2)
TXD1: U37.11(T1IN) U51.K16(TXD1/GPH4)
TXN: LAN1.2 R27.2 T11.1 U18.8(TX-)
TXP: LAN1.1 R4.2 T10.1 U18.7(TX+)
URXD0: T50.1 U19.13(R1IN) UART0.2 UART3.2
URXD1: T52.1 U37.13(R1IN) UART1.2
URXD2: R67.1 T54.1 U37.8(R2IN)
UTXD0: T51.1 U19.14(T1OUT) UART0.3 UART3.3
UTXD1: T53.1 U37.14(T1OUT) UART1.3
UTXD2: RS485.3 T55.1 U37.7(T2OUT)
VCLK: SN75LVDS83B1.31(CLKIN) T21.1 U51.L4(VCLK/GPC1) UNK57TFT.32
VD0: U51.N2(VD0/GPC8)
VD1: U51.L6(VD1/GPC9)
VD2: SN75LVDS83B1.51(D0) T24.1 U51.N4(VD2/GPC10) UNK57TFT.28
VD3: SN75LVDS83B1.52(D1) T25.1 U51.R1(VD3/GPC11) UNK57TFT.27
VD4: SN75LVDS83B1.54(D2) T26.1 U51.N3(VD4/GPC12) UNK57TFT.26
VD5: SN75LVDS83B1.55(D3) T27.1 U51.P2(VD5/GPC13) UNK57TFT.25
VD6: SN75LVDS83B1.56(D4) T28.1 U51.M6(VD6/GPC14) UNK57TFT.24
VD7: SN75LVDS83B1.3(D6) T29.1 U51.P3(VD7/GPC15) UNK57TFT.23
VD8: U51.R2(VD8/GPD0)
VD9: U51.M5(VD9/GPD1)
VD10: SN75LVDS83B1.4(D7) T30.1 U51.N5(VD10/GPD2) UNK57TFT.21
VD11: SN75LVDS83B1.6(D8) T31.1 U51.R3(VD11/GPD3) UNK57TFT.20
VD12: SN75LVDS83B1.7(D9) T32.1 U51.P4(VD12/GPD4) UNK57TFT.19
VD13: SN75LVDS83B1.11(D12) T33.1 U51.R4(VD13/GPD5) UNK57TFT.18
VD14: SN75LVDS83B1.12(D13) T34.1 U51.P5(VD14/GPD6) UNK57TFT.17
VD15: SN75LVDS83B1.14(D14) T35.1 U51.N6(VD15/GPD7) UNK57TFT.16
VD16: U51.M7(VD16/GPD8)
VD17: U51.T4(VD17/GPD9)
VD18: SN75LVDS83B1.15(D15) T36.1 U51.R5(VD18/SPICLK1/GPD10) UNK57TFT.14
VD19: SN75LVDS83B1.19(D18) T37.1 U51.T5(VD19/GPD11) UNK57TFT.13
VD20: SN75LVDS83B1.20(D19) T38.1 U51.P6(VD20/GPD12) UNK57TFT.12
VD21: SN75LVDS83B1.22(D20) T39.1 U51.R6(VD21/GPD13) UNK57TFT.11
VD22: SN75LVDS83B1.23(D21) T40.1 U51.N7(VD22/NSS1/GPD14) UNK57TFT.10
VD23: SN75LVDS83B1.24(D22) T41.1 U51.U5(VD23/NSS0/GPD15) UNK57TFT.9
VDEN: SN75LVDS83B1.30(D26) T42.1 U51.M4(VM:VDEN/GPC4) UNK57TFT.7
VREF: C66.1 C67.1 R55.2 U49.9(VREF)
VSYNC: SN75LVDS83B1.28(D25) T23.1 U51.L7(VFRAME/GPC3) UNK57TFT.30
WP_SD: J24.11(WP_SD) R32.2 U51.K15(UEXTCLK/GPH8)
XTI_PLL: C46.1 U51.G14(XTIPLL) Y12.1
XTI_RCT: C51.1 U51.M14(XTIRTC) Y4.1
XTO_PLL: C47.1 U51.G15(XTOPLL) Y12.2
XTO_RCT: C52.1 U51.L12(XTORTC) Y4.2
Y0M: LVDS1.7(IN0-) SN75LVDS83B1.48(Y0M) T91.1
Y0P: LVDS1.8(IN0+) SN75LVDS83B1.47(Y0P) T92.1
Y1M: LVDS1.9(IN1-) SN75LVDS83B1.46(Y1M) T93.1
Y1P: LVDS1.10(IN1+) SN75LVDS83B1.45(Y1P) T94.1
Y2M: LVDS1.11(IN2-) SN75LVDS83B1.42(Y2M) T95.1
Y2P: LVDS1.12(IN2+) SN75LVDS83B1.41(Y2P) T96.1
Y3M: LVDS1.17(NC3)
Y3P: LVDS1.18(NC4)
N18172115: C93.2 U37.4(C2+)
N18172128: C92.2 U37.1(C1+)
N18172136: C91.2 U37.6(V-)
N18172138: C90.2 U37.2(V+)
N18172221: C93.1 U37.5(C2-)
N18172223: C92.1 U37.3(C1-)
N18405028: BUZZER.2 Q2.3
N18630881: D9.1 L7.1 U42.1(SW)
N18762628: D3.2 L6.2 U8.2(OUT)
N18762630: C10.1 D11.2 F1.1 L6.1 T8.1 U8.4(FB)
N19270663: R57.2 T19.1 TV_IN1.1
N19270665: C75.1 C76.1 L10.1 R58.2 R61.2 T20.1 TV_IN1.2 TV_IN1.3 TV_IN1.4 TV_IN1.5 U45.2(VSSA1) U45.6(AGND) U45.8(TRST) U45.11(VSSA0) U45.41(VSSA2)
N19270669: C72.1 R57.1 R58.1
N19270676: C74.2 U45.32(XTALI) Y11.2
N19270696: R59.1 U45.40(CE)
N19270761: C72.2 U45.4(AI11)
N19270804: C73.2 U45.31(XTAL) Y11.1
N19271065: C75.2 U45.5(AI1D)
N19271067: C76.2 U45.44(AI2D)
N19346255: R61.1 U45.9(AOUT)
N19485712: C71.1 R15.1 T49.1 TP2.1(XM-) U49.5(Y-)
N19485716: C70.1 R14.1 T48.1 TP2.2(YM-) U49.4(X-)
N19485720: C69.1 R13.1 T47.1 TP2.3(XP+) U49.3(Y+)
N19485724: C68.1 R12.1 T46.1 TP2.4(YP+) U49.2(X+)
N19485806: C64.1 C65.1 R49.2 U49.1(VCC#1) U49.10(VCC#10)
N19561175: L13.1 T4.1 T5.1 UNK12V.3
N19787107: C1.1 R4.1 R27.1
N19787111: C79.1 U18.44(X1) Y6.1
N19787123: C80.1 U18.43(X2) Y6.2
N19787139: C9.1 R28.1 R37.1
N19787589: R62.1 U18.1(BGRES)
N19857502: R5.2 R21.2 U42.4(EN)
N19899869: D4.2 L14.3
N19899871: C6.1 D4.1 L13.2
N19899955: C6.2 L14.1 L15.2
N19908545: L15.1 T6.1 T7.1 UNK12V.2
N20243308: J24.15(NCD_SD) R31.2 R39.2 R40.2
N20348355: C7.1 R16.2 U51.U16(VREF)
N20348533: R18.2 U51.H14(NBATT_FLT)
N20348857: C18.1 U51.P17(UPLLCAP)
N20348863: C14.1 C17.1 U51.N14(MPLLCAP)
N20378358: R20.2 U56.19(\\\\WP)
N20384070: R30.2 U56.6(R/B\\\\2)
N20430616: R1.2 R10.2 U1.1(1DIR)
N20430618: R2.2 R11.2 U1.24(2DIR)
N20461373: LAN1.12 R9.2 T18.1
N20461378: LAN1.9 R8.2 T15.1
N20497199: R6.2 R7.2 U53.1
N20536390: R63.2 SN75LVDS83B1.17(CLKSEL)
N20536484: R64.1 SN75LVDS83B1.32(\\S\H\T\D\N)
N20554508: C87.1 U19.2(V+)
N20554534: C89.2 U19.4(C2+)
N20554542: C86.2 U19.1(C1+)
N20554552: C88.2 U19.6(V-)
N20554604: C89.1 U19.5(C2-)
N20554614: C86.1 U19.3(C1-)
N20554838: R66.2 R67.2 RS485.2
N184050960: Q2.1 R48.2
N192707401: R60.2 U45.26(RTS0)

Pads without a net: BT1 3; J2 1; J3 1; J4 1; J5 1; J8 1; LAN1 4; NOREF 1; NOREF#2 1; RS485 4 6 7 8 9; SLAVE 1; SN75LVDS83B1 37 38; T* 1; TP2 5 6; U18 19 20 21 46; U19 7 8 9 10; U45 7 25 36 38 39; U49 7 8 13; U51 J12; U54 40; U55 40; U56 1 2 3 4 5 10 11 14 15 20 21 22 23 24 25 26 27 28 33 34 35 38 39 40 45 46 47 48; UART1 1 4 6 7 8 9; UART2 1 2 3 4 5 6 7 8 9; UART3 1 4 6 7 8 9; UNK57TFT 1 2 3 4; UU1 3 4; UU2 3 4

## Via types
v1: diameter 0.508, hole 0.254, TOP to BOTTOM, 206 vias
v2: diameter 0.406, hole 0.203, TOP to BOTTOM, 427 vias
v3: diameter 0.889, hole 0.61, TOP to BOTTOM, 60 vias
v4: diameter 0.711, hole 0.356, TOP to BOTTOM, 2 vias
v5: diameter 0.61, hole 0.305, TOP to BOTTOM, 6 vias

## Routing (per net, layer and track width the routed paths; a pad name or vN(x,y) marks a point on that pad's centre or on a via; arc(x,y) is an arc through that point)
5V: length 267.4
  TOP w0.457: U42.6 50.94,78.66 51.5,78.1 52.77,78.1
  TOP w0.559: 48.34,19.2 48.34,18.11 49.71,16.74 UU2.5 ; 48.34,19.2 52.77,19.2 52.94,19.04 53.31,19.04 54.69,17.67 54.69,16.18 55.88,14.99 C11.1 ; 48.34,19.2 v1(48.34,20.75) 45.31,23.78 41.6,23.78 41,23.18 41,22.68 40.44,22.12 UU1.5
  TOP w0.838: v1(137.03,56.79) C12.1 C84.1 131.88,56.79 130.19,55.11 U39.3 ; HOSTA.1 56.39,12.14 55.91,12.63 C11.1 ; CB1.1 48.01,62.89 47.88,62.76 ; v3(57.76,78.23) 54.58,78.23 54.46,78.1 52.77,78.1 51.46,76.79 51.46,76.45 46.22,71.21 46.22,70.68 45.06,69.52 ; 47.88,65.35 47.93,65.3 U38.3
  TOP w1.27: BUZZER.1 47.88,61.62 47.88,66.93 45.29,69.52 44.68,69.52
  TOP w1.397: v3(44.5,73.51) 44.5,69.7 44.68,69.52 F1.2
  SIG3 w0.838: I/OPROT1.19 I/OPROT1.20
  SIG4 w0.838: v1(137.03,56.79) 137.85,56.79 141.63,60.58 141.63,82.3 135.97,87.96 117.3,87.96 114.82,90.43 I/OPROT1.20 I/OPROT1.19
  SIG4 w1.397: BUZZER.1 41.54,55.28 41.54,33.44 49.07,25.91 49.07,21.49 v1(48.34,20.75)
  VCC w0.838: I/OPROT1.19 I/OPROT1.20
  BOTTOM w0.838: I/OPROT1.19 I/OPROT1.20 113.98,92.01 113.83,92.01 T76.1
  BOTTOM w1.118: T76.1 106.22,94.11 84,94.11 81,91.11 79.1,91.11 77.7,89.71 70.97,89.71 69.75,88.49 64.97,88.49 57.76,81.28 v3(57.76,78.23)
  BOTTOM w1.397: v3(44.5,73.51) 44.6,73.41 44.6,73.08 44.88,72.79 T57.1
24V: length 41.5
  TOP w1.118: C8.1 30.35,55.22 30.68,54.89 D10.2 ; U8.1 26.59,79.32 C13.1
  TOP w1.676: L14.2 20.95,59.84 21.85,60.73 C63.1
  BOTTOM w1.676: C8.1 27.25,55.22 23.54,58.93 C63.1 25.7,62.9 C13.1
